# Altium PCB PCB.PcbDoc
Units mm, origin at the board's own origin, x right, y up, seen from the top; angles counter-clockwise.
Board outline 80 x 100 mm, 4 copper layers (Top Layer, GND, 3.3V, Bottom Layer), stack 1.216 mm thick; 61 components, 46 nets, 217 pads, 78 vias.
Unrouted connection lines stored in the file: 24.
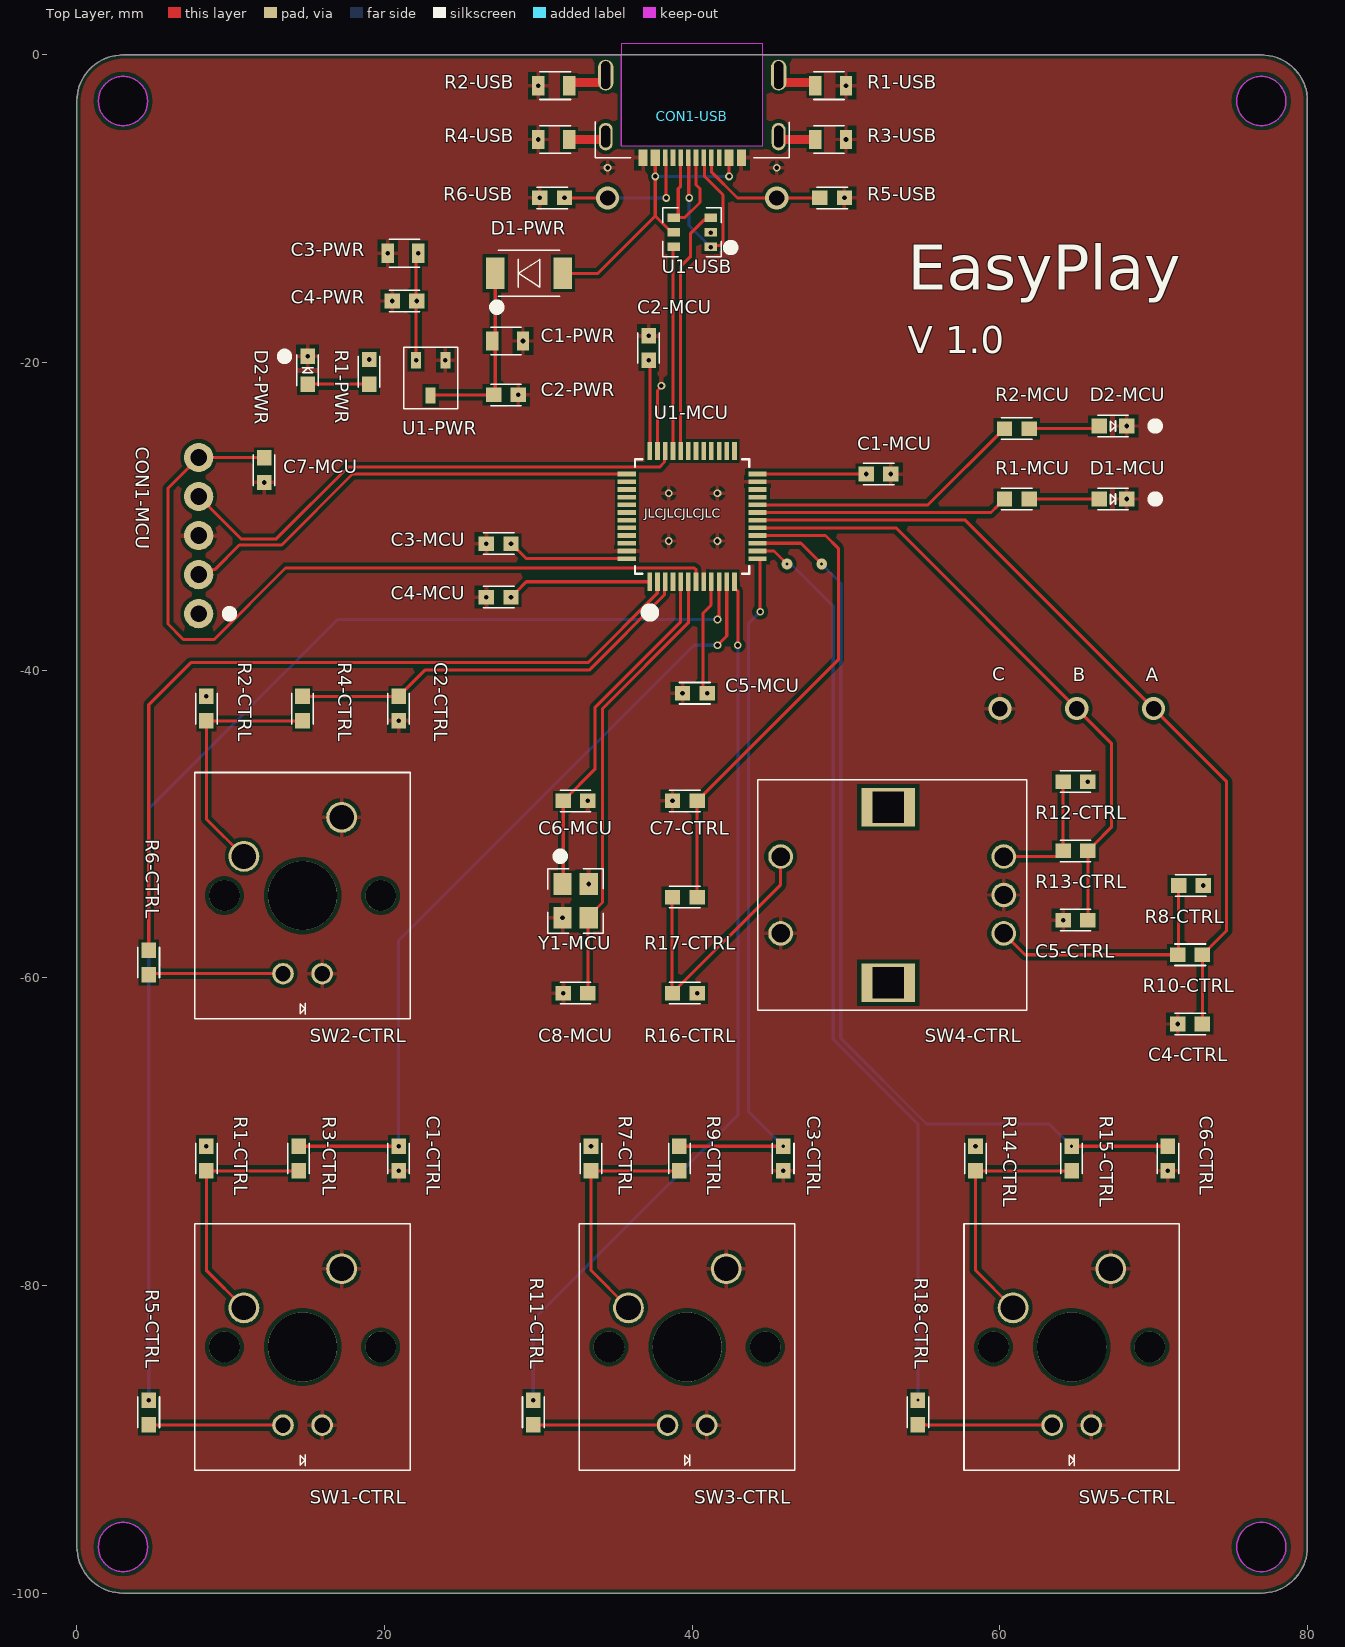
[diagram p0: Top Layer view]
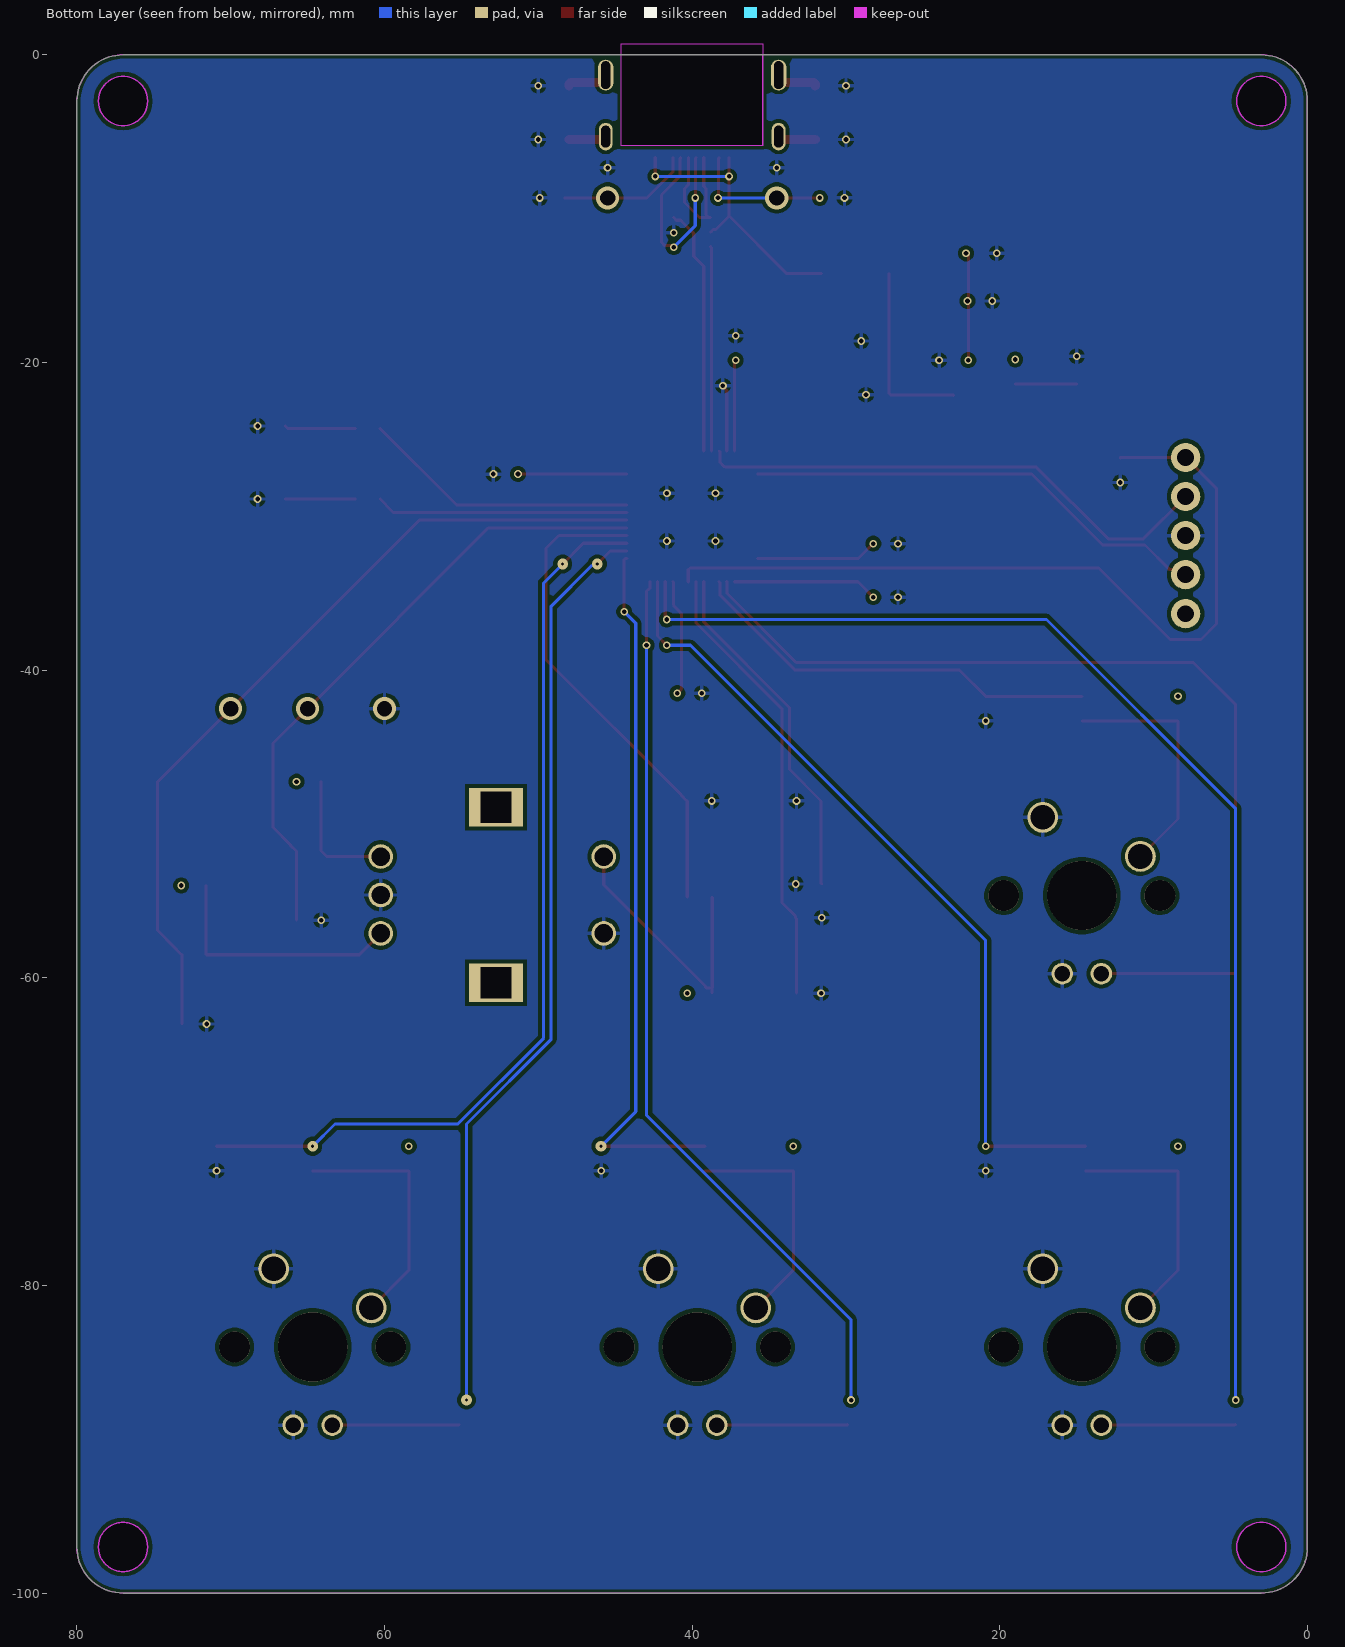
[diagram p1: Bottom Layer view, seen from below]
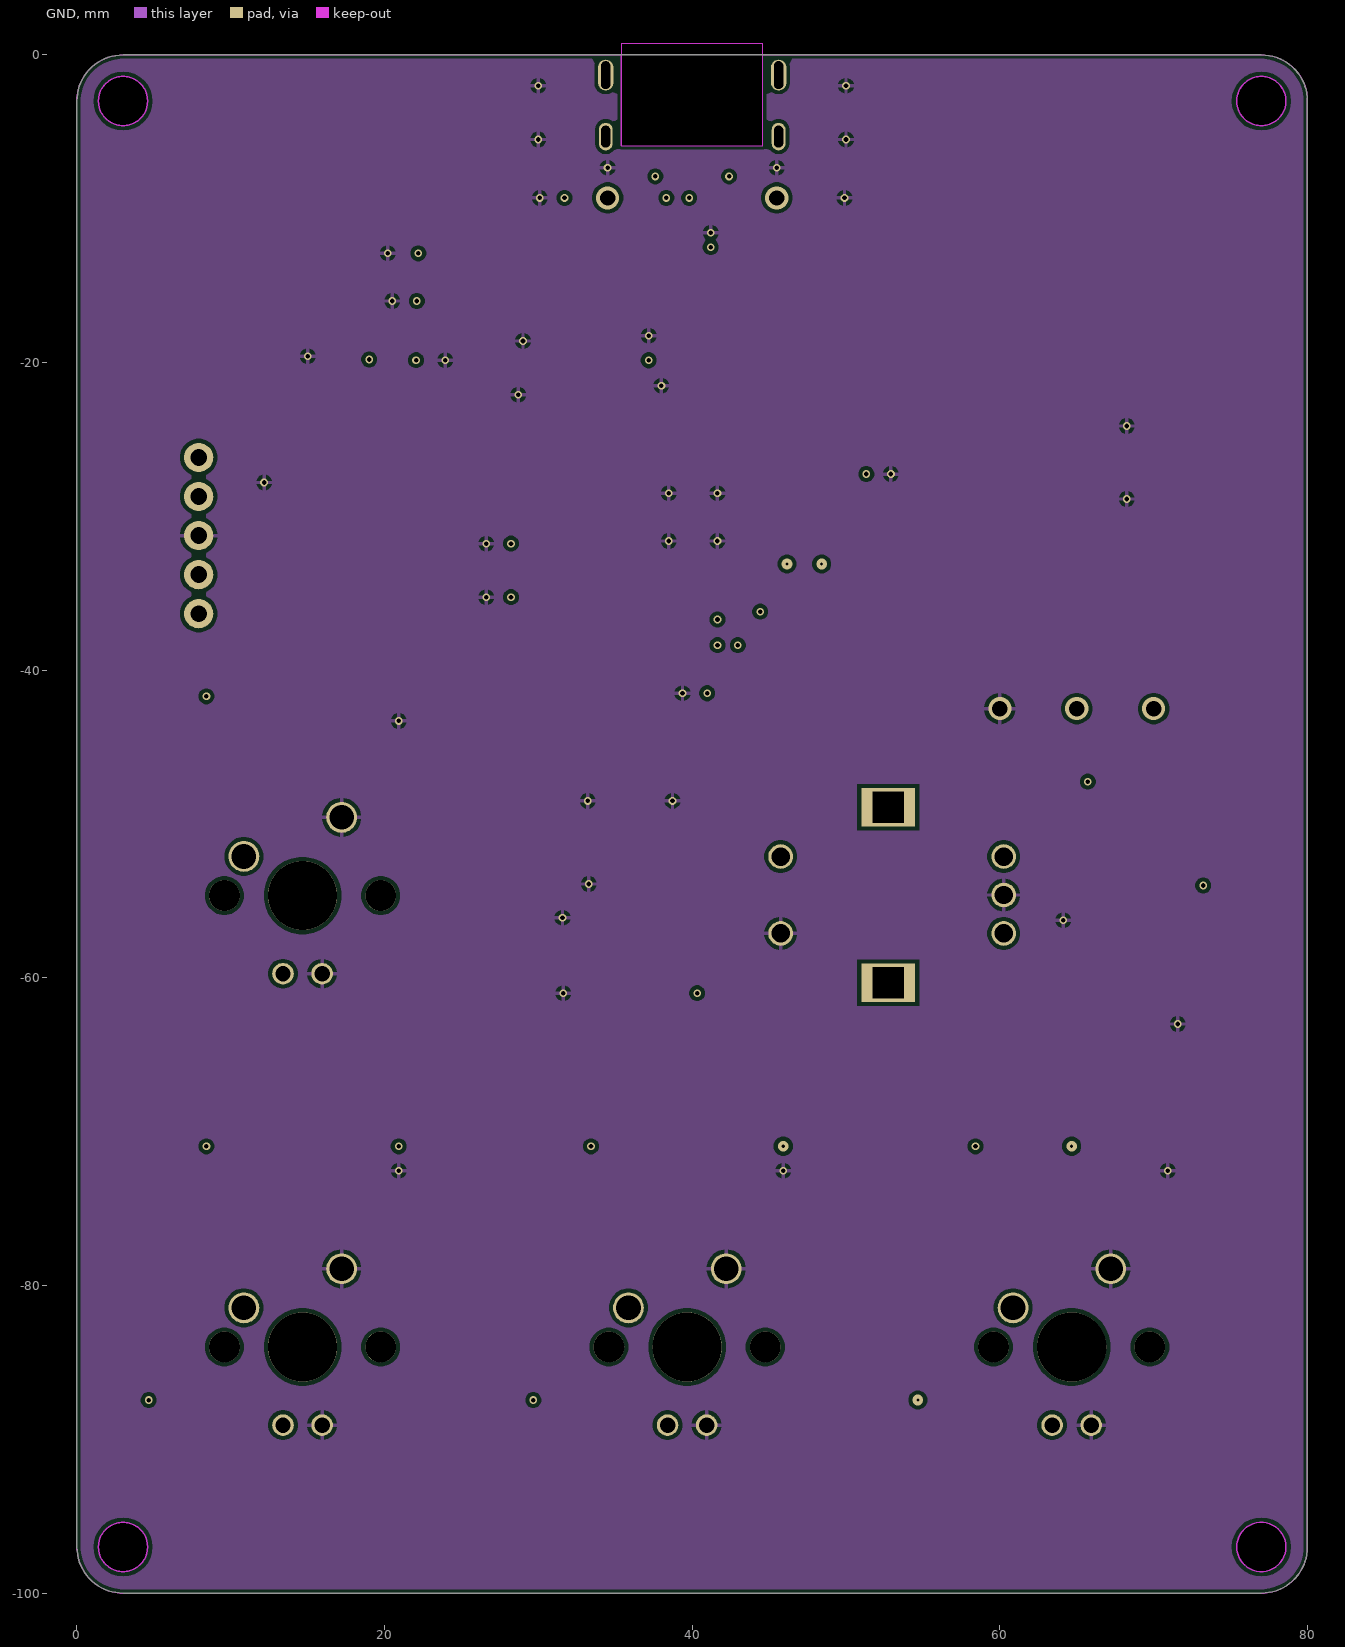
[diagram p2: GND]
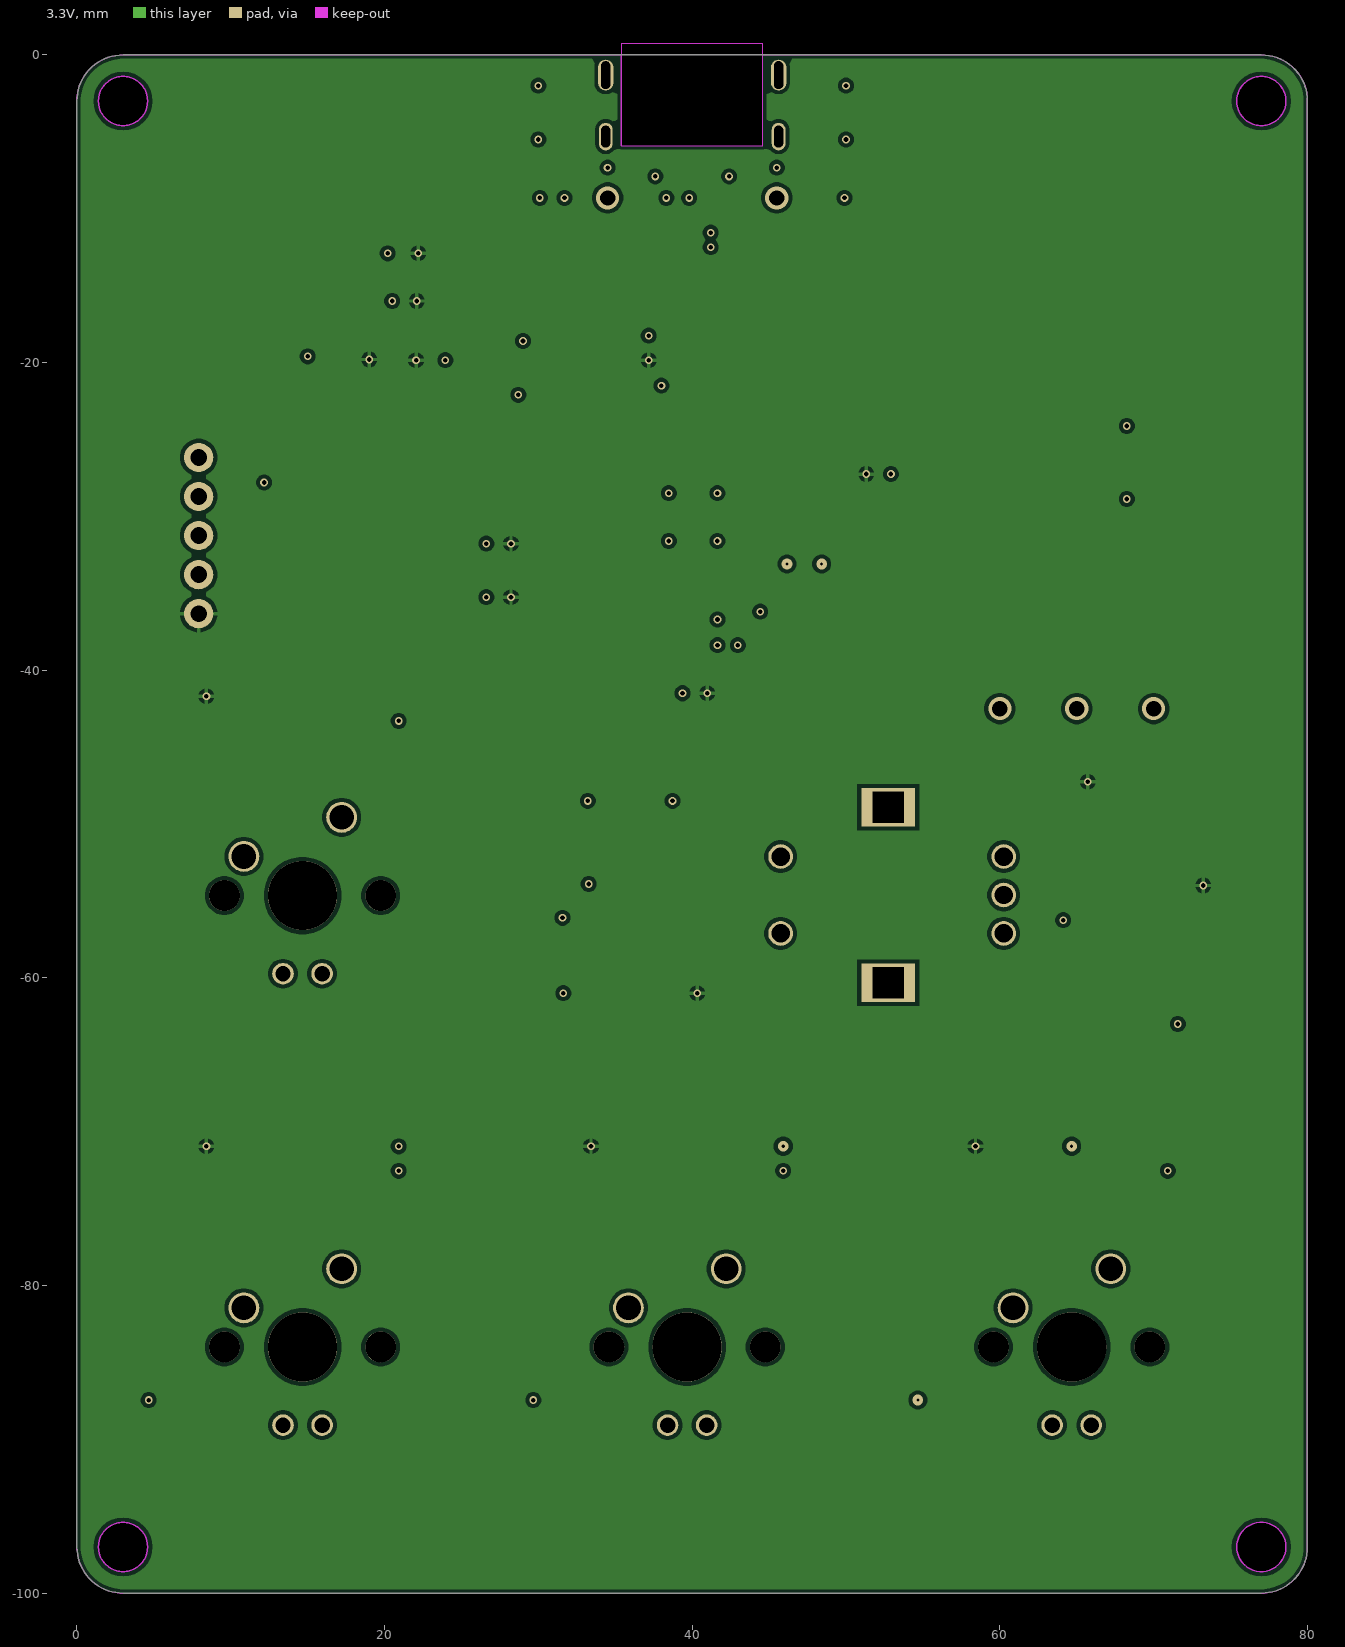
[diagram p3: 3.3V]
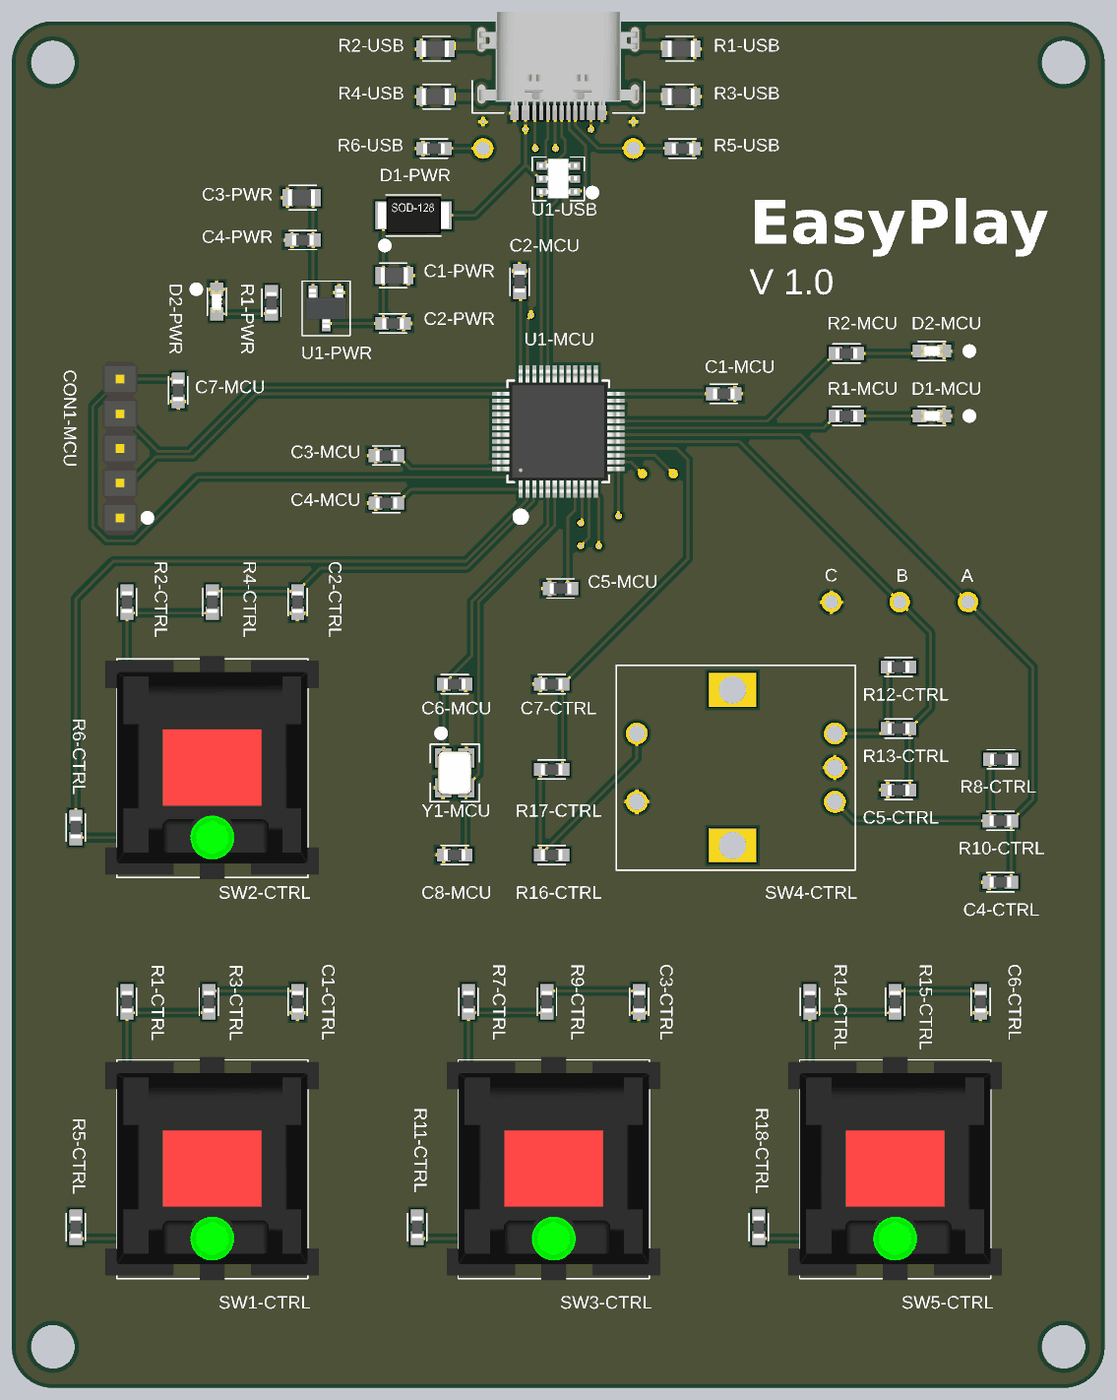
[diagram p4: 3D render of the assembled board from above, using the file's embedded part models]

## Layer stack, top to bottom
Top Mask: solder mask 0.015, Solder Resist, Dk 3.8
Top Layer: signal copper 0.035
Dielectric 1: prepreg 0.2, 7628, Dk 4.6
GND: signal copper 0.0175
Dielectric 2: core 0.7112, FR-4, Dk 4.5
3.3V: signal copper 0.0175
Dielectric 3: prepreg 0.2, 7628, Dk 4.6
Bottom Layer: signal copper 0.035
Bottom Mask: solder mask 0.015, Solder Resist, Dk 3.8

## Board outline
0,-97.003 0,-3.003 cw(c3,-3.003) 3,-0.003 77,-0.003 cw(c77,-3.003) 80,-3.003 80,-97.003 cw(c77,-97.003) 77,-100.003 3,-100.003 cw(c3,-97.003)
cut-out: 75.4,-97.003 ccw(c77,-97.003) 77,-98.603 ccw(c77,-97.003) 78.6,-97.003 ccw(c77,-97.003) 77,-95.403 ccw(c77,-97.003)
cut-out: 77,-4.603 cw(c77,-3.003) 75.4,-3.003 cw(c77,-3.003) 77,-1.403 cw(c77,-3.003) 78.6,-3.003 cw(c77,-3.003)
cut-out: 3,-4.603 cw(c3,-3.003) 1.4,-3.003 cw(c3,-3.003) 3,-1.403 cw(c3,-3.003) 4.6,-3.003 cw(c3,-3.003)
cut-out: 3,-98.603 cw(c3,-97.003) 1.4,-97.003 cw(c3,-97.003) 3,-95.403 cw(c3,-97.003) 4.6,-97.003 cw(c3,-97.003)

## Design rules (kind name [scope] priority, off if disabled: settings)
Clearance [All] p1: gap=0.254 ignorepadtopadclearanceinfootprint=FALSE except(0: Arc-Hole Track-Hole SMDPad-Hole THPad-Hole Via-Hole Fill-Hole Poly-Hole Region-Hole Text-Hole; 0.127: SMDPad-SMDPad; 0.2: Arc-Arc Arc-Track Arc-SMDPad Track-Track Track-SMDPad SMDPad-Poly SMDPad-Region; 0.33: Arc-THPad Track-THPad; 0.5: THPad-THPad)
HoleSize [All] p1: absolutevalues=TRUE maxlimit=6.3 minlimit=0.2 maxpercent=80.000 minpercent=20.000
HoleToHoleClearance [All] p1: gap=0.5 allowstackedmicrovias=TRUE
MinimumSolderMaskSliver [All] p1 off: minsoldermaskwidth=0.254
PolygonConnect [All] p1: connectstyle=Relief reliefconductorwidth=0.254 reliefentries=4 polygonreliefangle="90 Angle" airgapwidth=0.254
RoutingVias [All] p1: holewidth=0.2 width=0.7 viastyle="Through Hole" minholewidth=0.2 minwidth=0.4 maxholewidth=2 maxwidth=2
SilkToSilkClearance [All] p1: silktosilkclearance=0.15
SilkToSolderMaskClearance [IsPad] p1: minsilkscreentomaskgap=0.15 clearancetoexposedcopper=TRUE
SolderMaskExpansion [All] p1: expansion=0.102 istentingtop=FALSE
Width [All] p1: maxlimit=99 minlimit=0.2 preferedwidth=0.2
25 further rules are at their usual default settings.

## Components (designator, comment, footprint, x,y, rotation, side; value= is the part's Value field where it differs from the comment)
C1-CTRL "0.1uF, 50V, 0603" "0603 [1608]" 20.92,-71.753 r90 top
C1-MCU "0.1uF, 50V, 0603" "0603 [1608]" 52.12,-27.253 r0 top
C1-PWR "10uF, 35V, 0805" "0805 [2012]" 28,-18.603 r0 top
C2-CTRL "0.1uF, 50V, 0603" "0603 [1608]" 20.92,-42.503 r90 top
C2-MCU "0.1uF, 50V, 0603" "0603 [1608]" 37.17,-19.054 r90 top
C2-PWR "0.1uF, 50V, 0603" "0603 [1608]" 27.9,-22.103 r180 top
C3-CTRL "0.1uF, 50V, 0603" "0603 [1608]" 45.92,-71.753 r90 top
C3-MCU "0.1uF, 50V, 0603" "0603 [1608]" 27.42,-31.774 r180 top
C3-PWR "10uF, 35V, 0805" "0805 [2012]" 21.2,-12.903 r180 top
C4-CTRL "10nF, 25V, 0603" "0603 [1608]" 72.37,-63.003 r0 top
C4-MCU "0.1uF, 50V, 0603" "0603 [1608]" 27.42,-35.253 r180 top
C4-PWR "0.1uF, 50V, 0603" "0603 [1608]" 21.3,-16.003 r0 top
C5-CTRL "10nF, 25V, 0603" "0603 [1608]" 64.92,-56.253 r0 top
C5-MCU "0.1uF, 50V, 0603" "0603 [1608]" 40.17,-41.503 r180 top
C6-CTRL "0.1uF, 50V, 0603" "0603 [1608]" 70.92,-71.753 r90 top
C6-MCU "20pF, 50V, 0603" "0603 [1608]" 32.42,-48.503 r180 top
C7-CTRL "0.1uF, 50V, 0603" "0603 [1608]" 39.52,-48.503 r0 top
C7-MCU "0.1uF, 50V, 0603" "0603 [1608]" 12.17,-27.003 r270 top
C8-MCU "20pF, 50V, 0603" "0603 [1608]" 32.42,-61.003 r180 top
CON1-MCU "ST-LINK" "5X1 PIN HEADER (TH)" 7.92,-31.253 r90 top
CON1-USB "UFP" "MOLEX USB TYPE-C" 40,-4.003 r180 top
D1-MCU "2Vf, 20mA, yellow, 0603" "LED 0603 [1608]" 67.354,-28.877 r0 top
D1-PWR "30Vbr, 3A, 360mVf" SOD-128 29.4,-14.203 r0 top
D2-MCU "2.1Vf, 20mA, green, 0603" "LED 0603 [1608]" 67.354,-24.127 r0 top
D2-PWR "2Vf, 20mA, red, 0603" "LED 0603 [1608]" 15,-20.503 r90 top
R1-CTRL "100k, 100mW, 0603" "0603 [1608]" 8.42,-71.753 r90 top
R1-MCU "270R, 100mW, 0603" "0603 [1608]" 61.104,-28.877 r180 top
R1-PWR "270R, 100mW, 0603" "0603 [1608]" 19,-20.603 r90 top
R1-USB "0R, 125mW, 0805" "0805 [2012]" 49,-2.003 r0 top
R2-CTRL "100k, 100mW, 0603" "0603 [1608]" 8.42,-42.503 r90 top
R2-MCU "270R, 100mW, 0603" "0603 [1608]" 61.104,-24.3 r180 top
R2-USB "0R, 125mW, 0805" "0805 [2012]" 31,-2.003 r180 top
R3-CTRL "1k, 100mW, 0603" "0603 [1608]" 14.42,-71.753 r90 top
R3-USB "0R, 125mW, 0805" "0805 [2012]" 49,-5.503 r0 top
R4-CTRL "1k, 100mW, 0603" "0603 [1608]" 14.67,-42.503 r90 top
R4-USB "0R, 125mW, 0805" "0805 [2012]" 31,-5.503 r180 top
R5-CTRL "1k, 100mW, 0603" "0603 [1608]" 4.67,-88.253 r270 top
R5-USB "5.1k, 100mW, 0603" "0603 [1608]" 49.1,-9.303 r180 top
R6-CTRL "1k, 100mW, 0603" "0603 [1608]" 4.67,-59.003 r270 top
R6-USB "5.1k, 100mW, 0603" "0603 [1608]" 30.9,-9.303 r0 top
R7-CTRL "100k, 100mW, 0603" "0603 [1608]" 33.42,-71.753 r90 top
R8-CTRL "10k, 100mW, 0603" "0603 [1608]" 72.42,-54.003 r0 top
R9-CTRL "1k, 100mW, 0603" "0603 [1608]" 39.17,-71.753 r90 top
R10-CTRL "10k, 100mW, 0603" "0603 [1608]" 72.37,-58.503 r0 top
R11-CTRL "1k, 100mW, 0603" "0603 [1608]" 29.67,-88.253 r270 top
R12-CTRL "10k, 100mW, 0603" "0603 [1608]" 64.92,-47.253 r0 top
R13-CTRL "10k, 100mW, 0603" "0603 [1608]" 64.92,-51.753 r0 top
R14-CTRL "100k, 100mW, 0603" "0603 [1608]" 58.42,-71.753 r90 top
R15-CTRL "1k, 100mW, 0603" "0603 [1608]" 64.67,-71.753 r90 top
R16-CTRL "100k, 100mW, 0603" "0603 [1608]" 39.52,-61.003 r0 top
R17-CTRL "1k, 100mW, 0603" "0603 [1608]" 39.52,-54.753 r0 top
R18-CTRL "1k, 100mW, 0603" "0603 [1608]" 54.67,-88.253 r270 top
SW1-CTRL "Cherry MX, 10mA, 12V" "CHERRY MX SWITCH" 14.67,-84.003 r0 top
SW2-CTRL "Cherry MX, 10mA, 12V" "CHERRY MX SWITCH" 14.67,-54.654 r0 top
SW3-CTRL "Cherry MX, 10mA, 12V" "CHERRY MX SWITCH" 39.67,-84.003 r0 top
SW4-CTRL "Rotary Encoder w/ Switch" "Rotary Encoder w/ Switch (Bourns)" 53,-54.618 r0 top
SW5-CTRL "Cherry MX, 10mA, 12V" "CHERRY MX SWITCH" 64.67,-84.003 r0 top
U1-MCU "STM32F042C6T6" LQFP48 40,-30.003 r90 top
U1-PWR "3.3V, 250mA" SOT-23-3 23,-21.003 r180 top
U1-USB "100W, SOT457" SOT457 40,-11.528 r180 top
Y1-MCU "25MHz, 12pF, 3.2x2.5mm" "CRYSTAL 3.2X2.5MM" 32.42,-55.003 r270 top

## Footprints (in the part's own frame and the unit in brackets; to place one, negate y for a bottom-side part, rotate by r counter-clockwise, add the part's x,y. Pads: shape width x height; smd on the part's side, far side on the other; paste and mask are expansions set on the pad)
"5X1 PIN HEADER (TH)" [mm]
  round 1.9 hole 1.1: 1(-5.08,0) 2(-2.54,0) 3(0,0) 4(2.54,0) 5(5.08,0)
  silkscreen extent -5.18,-2.1 -4.98,-1.9, body extent -6.35,-1.27 6.35,1.27, height 9.51
"0603 [1608]" [mm]
  rect 1x0.95 smd: 1(-0.8,0) 2(0.8,0)
  silkscreen extent -1,-0.7 1,0.7, body extent -0.8,-0.4 0.8,0.4, height 0.81
"0805 [2012]" [mm]
  rect 0.8x1.25 smd: 1(-1,0) 2(1,0)
  silkscreen extent -1.1,-0.9 0.9,0.9, body extent -1,-0.6 1,0.6, height 0.91
"CHERRY MX SWITCH" [mm]
  round 2 hole 1.6 mask+0.102: 1(-3.81,2.54) 2(2.54,5.08)
  round 1.4 hole 1 mask+0.102: 3(-1.27,-5.08) 4(1.27,-5.08)
  round 2 hole 2 mask+0.102: ""(-5.08,0) ""(5.08,0)
  round 4.5 hole 4.5 mask+0.102: ""(0,0)
  silkscreen extent -7,-8 7,8, body extent -7.82,-8.13 7.82,8.2, height 14.75
"CRYSTAL 3.2X2.5MM" [mm]
  rect 1.4x1.2 smd: 1(-1.1,-0.85) 2(1.1,-0.85) 3(1.1,0.85) 4(-1.1,0.85)
  silkscreen extent -3,-1.8 2.1,1.8, body extent -1.6,-1.25 1.6,1.25, height 0.56
"LED 0603 [1608]" [mm]
  rect 1x0.95 smd: 1(0.9,0) 2(-0.9,0)
  silkscreen extent -1,-0.7 2.85,0.7, body extent -0.8,-0.35 0.8,0.35, height 0.7
LQFP48 [mm]
  rect 1.194x0.305 smd paste+0 mask+0: 1(-4.25,2.75) 2(-4.25,2.25) 3(-4.25,1.75) 4(-4.25,1.25) 5(-4.25,0.75) 6(-4.25,0.25) 7(-4.25,-0.25) 8(-4.25,-0.75) 9(-4.25,-1.25) 10(-4.25,-1.75) 11(-4.25,-2.25) 12(-4.25,-2.75) 25(4.25,-2.75) 26(4.25,-2.25) 27(4.25,-1.75) 28(4.25,-1.25) 29(4.25,-0.75) 30(4.25,-0.25) 31(4.25,0.25) 32(4.25,0.75) 33(4.25,1.25) 34(4.25,1.75) 35(4.25,2.25) 36(4.25,2.75)
  rect 0.305x1.194 smd paste+0 mask+0: 13(-2.75,-4.25) 14(-2.25,-4.25) 15(-1.75,-4.25) 16(-1.25,-4.25) 17(-0.75,-4.25) 18(-0.25,-4.25) 19(0.25,-4.25) 20(0.75,-4.25) 21(1.25,-4.25) 22(1.75,-4.25) 23(2.25,-4.25) 24(2.75,-4.25) 37(2.75,4.25) 38(2.25,4.25) 39(1.75,4.25) 40(1.25,4.25) 41(0.75,4.25) 42(0.25,4.25) 43(-0.25,4.25) 44(-0.75,4.25) 45(-1.25,4.25) 46(-1.75,4.25) 47(-2.25,4.25) 48(-2.75,4.25)
  silkscreen extent -6.35,-3.72 3.72,3.72, body extent -4.5,-4.5 4.5,4.5, height 1.6
"MOLEX USB TYPE-C" [mm] "Molex 216990-0003"
  rect 0.6x1.1 smd: A1-B12(-3.2,2.688) A4-B9(-2.4,2.688) B1-A12(3.2,2.688) B4-A9(2.4,2.688)
  rect 0.3x1.1 smd: A5(-1.25,2.688) A6(-0.25,2.688) A7(0.25,2.688) A8(1.25,2.688) B5(1.75,2.688) B6(0.75,2.688) B7(-0.75,2.688) B8(-1.75,2.688)
  oval 1x2 hole 0.6 slot 1.8 at 90 deg mask+0: S1(-5.62,-2.687) S2(5.62,-2.687)
  oval 0.9x1.8 hole 0.6 slot 1.4 at 90 deg mask+0: S3(-5.62,1.313) S4(5.62,1.313)
  Keep-Out Layer board cut-out: -4.6,1.9 -4.6,-4.713 4.6,-4.713 4.6,1.9
  silkscreen extent -6.3,0.34 6.3,2.69, body extent -5.77,-4.71 5.77,2.49, height 2.17
"Rotary Encoder w/ Switch (Bourns)" [mm] "PEC11H-4xxxF-Sxxxx"
  round 1.6 hole 1.2 mask+0.102: 1(-7.25,2.5) 2(-7.25,-2.5) A(7.25,-2.5) B(7.25,2.5) C(7.25,0)
  rect 3.5x2.5 hole 2 square mask+0.102: ""(-0.25,-5.7) ""(-0.25,5.7)
  silkscreen extent -8.75,-7.5 8.75,7.5, body extent -7.42,-6.56 7.53,6.56, height 19.31
SOD-128 [mm]
  rect 1.2x2.05 smd: 1(-2.2,0) 2(2.2,0)
  silkscreen extent -2.2,-2.3 2,1.5, body extent -2.6,-1.35 2.6,1.35, height 1.11
SOT457 [mm]
  rect 0.8x0.55 smd: 1(-1.2,0.95) 2(-1.2,0) 3(-1.2,-0.95) 4(1.2,-0.95) 5(1.2,0) 6(1.2,0.95)
  silkscreen extent -2.6,-1.6 1.9,1.6, body extent -1.37,-1.5 1.38,1.45, height 0.96
SOT-23-3 [mm]
  rect 0.65x1.05 smd mask+0.102: 1(-0.95,-1.15) 2(0.95,-1.15) 3(0,1.15)
  silkscreen extent -1.75,-2 1.75,2, body extent -1.5,-1.42 1.5,1.42, height 1.2

## Part data
C1-CTRL C1-MCU C2-CTRL C2-MCU C2-PWR C3-CTRL C3-MCU C4-MCU C4-PWR C5-MCU C6-CTRL C7-CTRL C7-MCU: library part Capacitor, Manufacturer="MULTICOMP PRO", Manufacturer ID=MC0603B104J500CT, Supplier=Farnell, Supplier ID=2320803, URL=https://ee.farnell.com/multicomp/mc0603b104j500ct/cap-0-1-f-50v-5-x7r-0603/dp/2320803?st=100%20nf
C1-PWR C3-PWR: library part Capacitor, Manufacturer=MURATA, Manufacturer ID=GRM21BR6YA106KE43L, Supplier=Farnell, Supplier ID=2611943, URL=https://ee.farnell.com/murata/grm21br6ya106ke43l/cap-10-f-35v-10-x5r-0805/dp/2611943
C4-CTRL C5-CTRL: library part Capacitor, Manufacturer=YAGEO, Manufacturer ID=CC0603KRX7R8BB103, Supplier=Farnell, Supplier ID=3019561, URL=https://ee.farnell.com/yageo/cc0603krx7r8bb103/cap-0-01-f-25v-10-x7r-0603/dp/3019561
C6-MCU C8-MCU: library part Capacitor, Manufacturer="MULTICOMP PRO", Manufacturer ID=MC0603N200J500CT, Supplier=Farnell, Supplier ID=2627461, URL=https://ee.farnell.com/multicomp/mc0603n200j500ct/cap-20pf-50v-5-c0g-np0-0603/dp/2627461
CON1-MCU: library part "5x1 Pin Header", Manufacturer=AMPHENOL, Manufacturer ID=68000-105HLF, Supplier=Farnell, Supplier ID=2751380, URL=https://ee.farnell.com/amphenol-icc-fci/68000-105hlf/connector-header-5pos-1row-2-54mm/dp/2751380
CON1-USB: library part "Molex USB 2.0 Type-C Receptacle", "USB Connector, USB Type C, USB 2.0, Receptacle, 16 Ways, Surface Mount, Right Angle", Manufacturer=MOLEX, Manufacturer ID=216990-0003, Supplier=Farnell, Supplier ID=3702962, URL=https://ee.farnell.com/molex/216990-0003/conector-usb-2-0-tipo-c-hembra/dp/3702962
D1-MCU: library part LED, Manufacturer=KINGBRIGHT, Manufacturer ID=KP-1608SYC, Supplier=Farnell, Supplier ID=8529841, URL=https://ee.farnell.com/kingbright/kp-1608syc/led-0-8mm-x-1-2mm-yellow-80mcd/dp/8529841
D1-PWR: library part "Schottky Rectifier (Diode)", Manufacturer=NEXPERIA, Manufacturer ID=PMEG3030EP,115, Supplier=Farnell, Supplier ID=1829195, URL=https://ee.farnell.com/nexperia/pmeg3030ep-115/diode-schottky-rec-30v-3a-sod128/dp/1829195
D2-MCU: library part LED, Manufacturer=KINGBRIGHT, Manufacturer ID=KP-1608CGCK, Supplier=Farnell, Supplier ID=2290328, URL=https://ee.farnell.com/kingbright/kp-1608cgck/led-0603-50mcd-green/dp/2290328
D2-PWR: library part LED, Manufacturer=VISHAY, Manufacturer ID=VLMS1300-GS08, Supplier=Farnell, Supplier ID=2251484, URL=https://ee.farnell.com/vishay/vlms1300-gs08/led-0603-red/dp/2251484?st=led
R1-CTRL R2-CTRL R7-CTRL R14-CTRL R16-CTRL: library part Resistor, Manufacturer=YAGEO, Manufacturer ID=RC0603FR-13100KL, Supplier=Farnell, Supplier ID=2309107, URL=https://ee.farnell.com/yageo/rc0603fr-13100kl/res-100k-1-0-1w-0603-thick-film/dp/2309107
R1-MCU R1-PWR R2-MCU: library part Resistor, Manufacturer=YAGEO, Manufacturer ID=RC0603FR-07270RL, Supplier=Farnell, Supplier ID=9238417, URL=https://ee.farnell.com/yageo/rc0603fr-07270rl/res-270r-1-0-1w-0603-thick-film/dp/9238417
R1-USB R2-USB R3-USB R4-USB: library part Resistor, Manufacturer="MULTICOMP PRO", Manufacturer ID=MC0805S8F0000T5E, Supplier=Farnell, Supplier ID=2309112, URL=https://ee.farnell.com/multicomp/mc0805s8f0000t5e/res-0r0-1-0-125w-0805-thick-film/dp/2309112
R3-CTRL R4-CTRL R5-CTRL R6-CTRL R9-CTRL R11-CTRL R15-CTRL R17-CTRL R18-CTRL: library part Resistor, Manufacturer=BOURNS, Manufacturer ID=CR0603-FX-1001ELF, Supplier=Farnell, Supplier ID=2008335, URL=https://ee.farnell.com/bourns/cr0603-fx-1001elf/res-1k-1-0-1w-0603-thick-film/dp/2008335
R5-USB R6-USB: library part Resistor, Manufacturer=YAGEO, Manufacturer ID=RC0603FR-075K1L, Supplier=Farnell, Supplier ID=3495881, URL=https://ee.farnell.com/yageo/rc0603fr-075k1l/res-5k1-1-0-1w-0603-thick-film/dp/3495881
R8-CTRL R10-CTRL R12-CTRL R13-CTRL: library part Resistor, Manufacturer=YAGEO, Manufacturer ID=RC0603FR-0710KL, Supplier=Farnell, Supplier ID=9238603, URL=https://ee.farnell.com/yageo/rc0603fr-0710kl/res-10k-1-0-1w-0603-thick-film/dp/9238603
SW1-CTRL SW2-CTRL SW3-CTRL SW5-CTRL: library part "Cherry MX Switch", Manufacturer="Cherry Americas LLC", Manufacturer ID=MX1A-11NW, Supplier=Digi-Key, Supplier ID=CH160-ND, URL=https://www.digikey.ee/en/products/detail/cherry-americas-llc/MX1A-11NW/91134
SW4-CTRL: Manufacturer=Bourns, Manufacturer ID=PEC11H-4015F-S0016, Supplier=Digi-Key, Supplier ID=118-PEC11H-4015F-S0016-ND, URL=https://www.digikey.ee/en/products/detail/bourns-inc/PEC11H-4015F-S0016/12349530
U1-MCU: library part "STM32F042C6T6 (MCU)", Manufacturer=STMicroelectronics, Manufacturer ID=STM32F042C6T6, Supplier=JLCPCB, Supplier ID=C88447, URL=https://jlcpcb.com/partdetail/Stmicroelectronics-STM32F042C6T6/C88447
U1-PWR: library part "LDO Regulator", "Fixed LDO Voltage Regulator, 2.3V to 6V, 178mV Dropout, 3.3Vout, 250mAout, SOT-23-3", Manufacturer=Microchip, Manufacturer ID=MCP1700T-3302E/TT, Supplier=Farnell, Supplier ID=1296592, URL=https://ee.farnell.com/microchip/mcp1700t-3302e-tt/ic-v-reg-ldo-250ma-smd-sot-23/dp/1296592?st=3.3
U1-USB: library part "ESD Protection Device", Manufacturer=NEXPERIA, Manufacturer ID=IP4234CZ6,125, Supplier=Farnell, Supplier ID=1829276, URL=https://ee.farnell.com/nexperia/ip4234cz6-125/diode-esd-tvs-usb2-0-sot457/dp/1829276
Y1-MCU: library part "Crystal 4-pin", Manufacturer="MULTICOMP PRO", Manufacturer ID=MCSJK-7U-25.00-12-10-60-B-10, Supplier=Farnell, Supplier ID=2853968, URL=https://ee.farnell.com/multicomp/mcsjk-7u-25-00-12-10-60-b-10/crystal-25mhz-12pf-3-2mm-x-2-5mm/dp/2853968?st=mcsjk-7u-25.00-12-10-60-b-10

## Via types
v1: diameter 0.5, hole 0.3, Top Layer to Bottom Layer, 68 vias
v2: diameter 1.5, hole 1, Top Layer to Bottom Layer, 5 vias
v3: diameter 0.7, hole 0.2, Top Layer to Bottom Layer, 5 vias

## Nets (pads, with @x,y where several pads share a name; then routed paths per layer and width w, separated by ;. In a path a pad name is that pad's centre, name@x,y a point inside that pad or via, vN(x,y) a via of type N, cw(c..) or ccw(c..) an arc to the next point about the centre after c; other vN are vias at no path point)
3.3V: C1-MCU.1 C2-MCU.1 C3-MCU.1 C3-PWR.1 C4-MCU.1 C4-PWR.2 C5-MCU.1 CON1-MCU.1 R1-CTRL.2 R1-PWR.2 R2-CTRL.2 R7-CTRL.2 R8-CTRL.2 R12-CTRL.2 R14-CTRL.2 R16-CTRL.2 U1-MCU.1 U1-MCU.9 U1-MCU.24 U1-MCU.36 U1-MCU.48 U1-PWR.2 | length 45.1
  Top Layer w0.2: v1(19,-19.803) R1-PWR.2@19.05,-19.853 ; v1(22.05,-19.853) 22.05,-13.053 v1(22.2,-12.903) ; v1(28.22,-35.253) 28.245,-35.253 28.62,-34.878 28.62,-34.853 29.22,-34.253 U1-MCU.1 ; v1(28.22,-31.774) 28.245,-31.774 29.224,-32.753 U1-MCU.48 ; v1(37.17,-19.854) 37.25,-19.934 U1-MCU.36 ; v1(40.97,-41.503) 40.7,-41.233 40.7,-36.303 41.227,-35.775 41.227,-34.275 U1-MCU.9 ; U1-MCU.24 v1(51.32,-27.253)
  other v1: 8.42,-70.953 33.42,-70.953 58.42,-70.953 40.32,-61.003 73.22,-54.003 65.72,-47.253 8.42,-41.703 22.1,-16.003
BTN-A: C1-CTRL.2 R3-CTRL.2 U1-MCU.11 | length 52.9
  Top Layer w0.2: R3-CTRL.2 v1(20.92,-70.953) ; v1(41.646,-38.381) 42.25,-37.777 U1-MCU.11
  Bottom Layer w0.2: v1(20.92,-70.953) 20.92,-57.576 40.114,-38.381 v1(41.646,-38.381)
BTN-A-LED: R5-CTRL.1 U1-MCU.10 | length 83
  Top Layer w0.2: v1(41.646,-36.708) 41.646,-36.626 41.75,-36.522 U1-MCU.10
  Bottom Layer w0.2: v1(4.67,-87.453) 4.67,-49.003 16.965,-36.708 v1(41.646,-36.708)
BTN-B: C3-CTRL.2 R9-CTRL.2 U1-MCU.13 | length 46.3
  Top Layer w0.2: R9-CTRL.2 v3(45.92,-70.953) ; U1-MCU.13 44.368,-32.753 44.42,-32.805 v1(44.42,-36.204)
  Bottom Layer w0.2: v1(44.42,-36.204) 43.67,-36.954 43.67,-68.703 v3(45.92,-70.953)
BTN-B-LED: R11-CTRL.1 U1-MCU.12 | length 58.8
  Top Layer w0.2: U1-MCU.12 42.75,-34.697 42.802,-34.75 42.849,-34.75 42.966,-34.867 v1(42.966,-38.381)
  Bottom Layer w0.2: v1(29.67,-87.453) 29.67,-82.233 42.966,-68.937 v1(42.966,-38.381)
BTN-C: C6-CTRL.2 R15-CTRL.2 U1-MCU.15 | length 60.2
  Top Layer w0.2: U1-MCU.15 47.072,-31.753 v3@48.42,-33.101 ; v3(64.67,-70.953) C6-CTRL.2
  Bottom Layer w0.2: v3@48.42,-33.101 49.658,-34.339 49.658,-63.925 55.236,-69.503 63.22,-69.503 v3(64.67,-70.953)
  other v3: 48.42,-33.105
BTN-C-LED: R18-CTRL.1 U1-MCU.14 | length 60.3
  Top Layer w0.2: U1-MCU.14 45.318,-32.253 v3(46.17,-33.105)
  Bottom Layer w0.2: v3(46.17,-33.105) 46.266,-33.201 46.526,-33.201 49.17,-35.845 49.17,-64.003 54.67,-69.503 v3(54.67,-87.453)
BTN-D: C2-CTRL.2 R4-CTRL.2 U1-MCU.3 | length 27.1
  Top Layer w0.2: R4-CTRL.2 C2-CTRL.2 22.62,-40.003 33.301,-40.003 38.202,-35.101 38.202,-34.3 U1-MCU.3
BTN-D-LED: R6-CTRL.1 U1-MCU.2 | length 52.8
  Top Layer w0.2: R6-CTRL.1 4.67,-42.253 7.409,-39.514 33.224,-39.514 37.731,-35.007 37.731,-34.272 U1-MCU.2
CC1: CON1-USB.A5 R5-USB.2 | length 8.7
  Top Layer w0.2: CON1-USB.A5 41.25,-7.607 42.946,-9.303 v2(45.5,-9.303) R5-USB.2
CC2: CON1-USB.B5 R6-USB.2 | length 9.3
  Top Layer w0.2: v1(31.7,-9.303) v2(34.5,-9.303) ; CON1-USB.B5 38.286,-6.726 38.286,-9.267 v1(38.321,-9.303)
  Bottom Layer w0.2: v2(34.5,-9.303) v1(38.321,-9.303)
DEBUG-LED-A: R1-MCU.2 U1-MCU.19 | length 16.4
  Top Layer w0.2: U1-MCU.19 59.428,-29.753 59.904,-29.277 59.904,-29.252 60.279,-28.877 R1-MCU.2
DEBUG-LED-B: R2-MCU.2 U1-MCU.20 | length 18.1
  Top Layer w0.2: U1-MCU.20 55.327,-29.253 60.279,-24.3 R2-MCU.2
DM: CON1-USB.A7 CON1-USB.B7 U1-USB.1 | length 13.3
  Top Layer w0.2: CON1-USB.A7 39.775,-6.715 39.775,-9.278 v1(39.8,-9.303) ; CON1-USB.B7 40.8,-6.74 40.8,-7.903 42,-9.103 42,-12.188 41.783,-12.405 41.272,-12.405 U1-USB.1
  Bottom Layer w0.2: v1(39.8,-9.303) 39.8,-11.103 v1(41.2,-12.503)
DP: CON1-USB.A6 CON1-USB.B6 U1-USB.4 | length 9.1
  Top Layer w0.2: U1-USB.4 U1-USB.4@38.921,-10.578 ; CON1-USB.B6 39.25,-8.553 39.096,-8.707 39.096,-10.403 U1-USB.4@38.921,-10.578 ; CON1-USB.A6 40.25,-8.453 40.504,-8.707 40.504,-9.594 39.521,-10.578 U1-USB.4@38.921,-10.578
GND: C1-CTRL.1 C1-MCU.2 C1-PWR.2 C2-CTRL.1 C2-MCU.2 C2-PWR.1 C3-CTRL.1 C3-MCU.2 C3-PWR.2 C4-CTRL.1 C4-MCU.2 C4-PWR.1 C5-CTRL.1 C5-MCU.2 C6-CTRL.1 C6-MCU.1 C7-CTRL.1 C7-MCU.2 C8-MCU.2 CON1-MCU.3 CON1-USB.A1-B12 CON1-USB.B1-A12 D1-MCU.1 D2-MCU.1 D2-PWR.1 R1-USB.2 R2-USB.2 R3-USB.2 R4-USB.2 R5-USB.1 R6-USB.1 SW1-CTRL.2 SW1-CTRL.4 SW2-CTRL.2 SW2-CTRL.4 SW3-CTRL.2 SW3-CTRL.4 SW4-CTRL.2 SW4-CTRL.C SW5-CTRL.2 SW5-CTRL.4 U1-MCU.8 U1-MCU.23 U1-MCU.35 U1-MCU.47 U1-PWR.1 U1-USB.2 Y1-MCU.2 Y1-MCU.4 | length 4.4
  Top Layer w0.2: U1-MCU.35 37.75,-21.817 38,-21.567 v1(38,-21.503)
  other v1: 20.92,-72.553 45.92,-72.553 70.92,-72.553 71.57,-63.003 31.62,-61.003 64.12,-56.253 31.57,-56.103 33.27,-53.903 33.22,-48.503 38.72,-48.503 20.92,-43.303 39.37,-41.503 26.62,-35.253 26.62,-31.774 38.485,-31.603 41.642,-31.603 68.254,-28.877 38.485,-28.496 41.642,-28.496 12.17,-27.803 52.92,-27.253 68.254,-24.127 28.7,-22.103 23.95,-19.853 15,-19.603 29,-18.603 37.17,-18.254 20.5,-16.003 20.2,-12.903 41.2,-11.557 30.1,-9.303 49.9,-9.303 34.5,-7.337 45.5,-7.337 30,-5.503 50,-5.503 30,-2.003 50,-2.003
  other v2: 60,-42.5
KNOB-BTN: C7-CTRL.2 R17-CTRL.2 U1-MCU.16 | length 32.1
  Top Layer w0.2: R17-CTRL.2 C7-CTRL.2 40.345,-48.503 40.72,-48.128 40.72,-48.103 49.5,-39.323 49.5,-32.083 48.67,-31.253 U1-MCU.16
KNOB-CH-A: C4-CTRL.2 R10-CTRL.2 U1-MCU.18 | length 54
  Top Layer w0.2: U1-MCU.18 57.753,-30.253 v2(70,-42.5) 74.75,-47.25 74.75,-56.923 73.57,-58.103 73.57,-58.128 73.195,-58.503 R10-CTRL.2 C4-CTRL.2
KNOB-CH-B: C5-CTRL.2 R13-CTRL.2 U1-MCU.17 | length 40.9
  Top Layer w0.2: U1-MCU.17 53.253,-30.753 v2(65,-42.5) 67.25,-44.75 67.25,-50.223 66.12,-51.353 66.12,-51.378 65.745,-51.753 R13-CTRL.2 C5-CTRL.2
NetC1-PWR_1: C1-PWR.1 C2-PWR.2 D1-PWR.1 U1-PWR.3 | length 12.1
  Top Layer w0.2: U1-PWR.3 23.05,-22.103 C2-PWR.2 27.2,-22.003 D1-PWR.1
NetCON1-USB_S1: CON1-USB.S1 R1-USB.1 | length 3.4
  Top Layer w0.2: R1-USB.1@47.7,-1.599 48,-1.899 R1-USB.1
  Top Layer w0.6: CON1-USB.S1 45.62,-1.615 45.805,-1.8 47.9,-1.8 48,-1.9 R1-USB.1
NetCON1-USB_S2: CON1-USB.S2 R2-USB.1 | length 2.9
  Top Layer w0.6: R2-USB.1 32,-1.9 32.1,-1.8 34.195,-1.8 34.38,-1.615 CON1-USB.S2
NetCON1-USB_S3: CON1-USB.S3 R3-USB.1 | length 2.5
  Top Layer w0.6: CON1-USB.S3 45.62,-5.364 45.759,-5.503 R3-USB.1
NetCON1-USB_S4: CON1-USB.S4 R4-USB.1 | length 2.5
  Top Layer w0.6: R4-USB.1 34.241,-5.503 34.38,-5.364 CON1-USB.S4
NetD1-CTRL_2: R5-CTRL.2 SW1-CTRL.3 | length 8.7
  Top Layer w0.2: R5-CTRL.2 4.7,-89.083 SW1-CTRL.3
NetD1-MCU_2: D1-MCU.2 R1-MCU.1 | length 4.6
  Top Layer w0.2: R1-MCU.1 D1-MCU.2
NetD2-CTRL_2: R6-CTRL.2 SW2-CTRL.3 | length 8.8
  Top Layer w0.2: R6-CTRL.2 4.739,-59.734 SW2-CTRL.3
NetD2-MCU_2: D2-MCU.2 R2-MCU.1 | length 4.6
  Top Layer w0.2: R2-MCU.1 66.281,-24.3 D2-MCU.2
NetD2-PWR_2: D2-PWR.2 R1-PWR.1 | length 4
  Top Layer w0.2: D2-PWR.2 R1-PWR.1
NetD3-CTRL_2: R11-CTRL.2 SW3-CTRL.3 | length 8.5
  Top Layer w0.2: R11-CTRL.2@29.92,-89.053 29.95,-89.083 SW3-CTRL.3
NetD4-CTRL_2: R18-CTRL.2 SW5-CTRL.3 | length 8.2
  Top Layer w0.2: 55.17,-89.053 55.2,-89.083 SW5-CTRL.3
NetR1-CTRL_1: R1-CTRL.1 R3-CTRL.1 SW1-CTRL.1 | length 15.9
  Top Layer w0.2: SW1-CTRL.1 8.42,-79.023 R1-CTRL.1 R3-CTRL.1
NetR2-CTRL_1: R2-CTRL.1 R4-CTRL.1 SW2-CTRL.1 | length 16.1
  Top Layer w0.2: SW2-CTRL.1 8.42,-49.674 R2-CTRL.1 R4-CTRL.1
NetR7-CTRL_1: R7-CTRL.1 R9-CTRL.1 SW3-CTRL.1 | length 15.7
  Top Layer w0.2: SW3-CTRL.1 33.42,-79.023 R7-CTRL.1 R9-CTRL.1
NetR8-CTRL_1: R8-CTRL.1 R10-CTRL.1 SW4-CTRL.A | length 16.4
  Top Layer w0.2: SW4-CTRL.A 61.635,-58.503 R10-CTRL.1 71.62,-58.453 R8-CTRL.1
NetR12-CTRL_1: R12-CTRL.1 R13-CTRL.1 SW4-CTRL.B | length 8.5
  Top Layer w0.2: SW4-CTRL.B 63.755,-52.118 R13-CTRL.1 R12-CTRL.1
NetR14-CTRL_1: R14-CTRL.1 R15-CTRL.1 SW5-CTRL.1 | length 16.2
  Top Layer w0.2: SW5-CTRL.1 58.42,-79.023 R14-CTRL.1 R15-CTRL.1
NetR16-CTRL_1: R16-CTRL.1 R17-CTRL.1 SW4-CTRL.1 | length 17.9
  Top Layer w0.2: R16-CTRL.1@38.695,-60.666 38.695,-54.778 R17-CTRL.1 ; R16-CTRL.1 38.72,-60.691 38.745,-60.666 39.081,-60.666 39.12,-60.628 39.12,-60.572 45.75,-53.942 SW4-CTRL.1
NRST: C7-MCU.1 CON1-MCU.5 U1-MCU.7 | length 53.4
  Top Layer w0.2: C7-MCU.1 12.14,-26.173 CON1-MCU.5 5.92,-28.173 5.92,-37.003 6.92,-38.003 8.92,-38.003 13.567,-33.356 40.139,-33.356 40.256,-33.473 40.256,-34.247 U1-MCU.7
RCC-OSC-IN: C6-MCU.2 U1-MCU.5 Y1-MCU.1 | length 22.8
  Top Layer w0.2: Y1-MCU.1 31.62,-53.853 C6-MCU.2 33.67,-46.453 33.67,-42.437 39.25,-36.857 U1-MCU.5
RCC-OSC-OUT: C8-MCU.1 U1-MCU.6 Y1-MCU.3 | length 29.5
  Top Layer w0.2: C8-MCU.1 33.22,-56.153 Y1-MCU.3 33.27,-56.003 34.17,-55.103 34.17,-42.503 39.75,-36.923 U1-MCU.6
SYS-SWCLK: CON1-MCU.2 U1-MCU.37 | length 30.5
  Top Layer w0.2: CON1-MCU.2 8.245,-33.467 8.955,-33.467 10.559,-31.864 13.309,-31.864 17.92,-27.253 U1-MCU.37
SYS-SWDIO: CON1-MCU.4 U1-MCU.34 | length 34.2
  Top Layer w0.2: CON1-MCU.4 10.671,-31.464 12.959,-31.464 17.622,-26.8 37.876,-26.8 38.202,-26.474 38.202,-25.8 U1-MCU.34
USB-DM: U1-MCU.32 U1-USB.3 | length 16.1
  Top Layer w0.2: U1-MCU.32 39.25,-13.753 39.9,-13.103 39.9,-11.603 40.5,-11.003 40.75,-10.753 41.025,-10.753 U1-USB.3
USB-DP: U1-MCU.33 U1-USB.6 | length 13.3
  Top Layer w0.2: U1-MCU.33 38.75,-12.528 U1-USB.6
VBUS: CON1-USB.A4-B9 CON1-USB.B4-A9 D1-PWR.2 U1-USB.5 | length 19
  Top Layer w0.2: D1-PWR.2 33.874,-14.203 37.6,-10.477 ; CON1-USB.B4-A9 v1(37.6,-7.903) 37.6,-10.477 ; U1-USB.5 38.625,-11.353 38.476,-11.353 37.6,-10.477 ; v1(42.4,-7.903) CON1-USB.A4-B9
  Bottom Layer w0.2: v1(37.6,-7.903) v1(42.4,-7.903)
pads on no net: CON1-USB.A8 CON1-USB.B8 SW1-CTRL. SW2-CTRL. SW3-CTRL. SW4-CTRL. SW5-CTRL. U1-MCU.4 U1-MCU.21 U1-MCU.22 U1-MCU.25 U1-MCU.26 U1-MCU.27 U1-MCU.28 U1-MCU.29 U1-MCU.30 U1-MCU.31 U1-MCU.38 U1-MCU.39 U1-MCU.40 U1-MCU.41 U1-MCU.42 U1-MCU.43 U1-MCU.44 U1-MCU.45 U1-MCU.46

## Polygon pours and split planes (outlines as drawn)
GND on Top Layer "TOP-GND-POLYGON" (solid, remove dead copper, pour order 1): 0,0 0,-100.003 80,-100.003 80,-0.074
GND on GND "GND-POLYGON" (solid, remove dead copper, pour order 2): 0,-0.003 0,-100.003 80,-100.003 80,-0.003
3.3V on 3.3V "POWER-POLYGON" (solid, remove dead copper, pour order 3): 0,-0.003 0,-100.003 80,-100.003 80,-0.003
GND on Bottom Layer "BOTTOM-GND-POLYGON" (solid, remove dead copper, pour order 4): 0,-0.003 0,-100.003 80,-100.003 80,-0.003

## Keep-outs
Keep-Out Layer:
  circle w0.1: c77,-3.003 r1.6
  circle w0.1: c77,-97.003 r1.6
  circle w0.1: c3,-97.003 r1.6
  circle w0.1: c3,-3.003 r1.6
  lines w0.01: 0,-97.199 0,-97.003 0,-3.003 0,-2.806 0.051,-2.416 0.153,-2.036 0.304,-1.673 0.5,-1.332 0.74,-1.02 1.018,-0.742 1.33,-0.503 1.67,-0.306 2.034,-0.156 2.413,-0.054 2.803,-0.003 35.4,-0.003 35.4,-5.903 44.6,-5.903 44.6,-0.003 77.197,-0.003 77.587,-0.054 77.966,-0.156 78.33,-0.306 78.67,-0.503 78.982,-0.742 79.26,-1.02 79.5,-1.332 79.696,-1.673 79.847,-2.036 79.949,-2.416 80,-2.806 80,-3.003 80,-97.003 80,-97.199 79.949,-97.589 79.847,-97.969 79.696,-98.332 79.5,-98.673 79.26,-98.985 78.982,-99.263 78.67,-99.502 78.33,-99.699 77.966,-99.85 77.587,-99.951 77.197,-100.003 2.803,-100.003 2.413,-99.951 2.034,-99.85 1.67,-99.699 1.33,-99.502 1.018,-99.263 0.74,-98.985 0.5,-98.673 0.304,-98.332 0.153,-97.969 0.051,-97.589 0,-97.199

## Silkscreen, mask and mechanical layers (free items; w line width, h text height)
Top Overlay:
  text "EasyPlay" at 54,-16.258 h5
  text "V 1.0" at 54.003,-19.969 h3
  text "JLCJLCJLCJLC" at 36.898,-30.292 h1
  text "C" at 59.5,-40.983 h1.5
  text "B" at 64.75,-41 h1.5
  text "A" at 69.5,-41 h1.5